# EAGLE board PCB v12 (EAGLE 9.7.0)
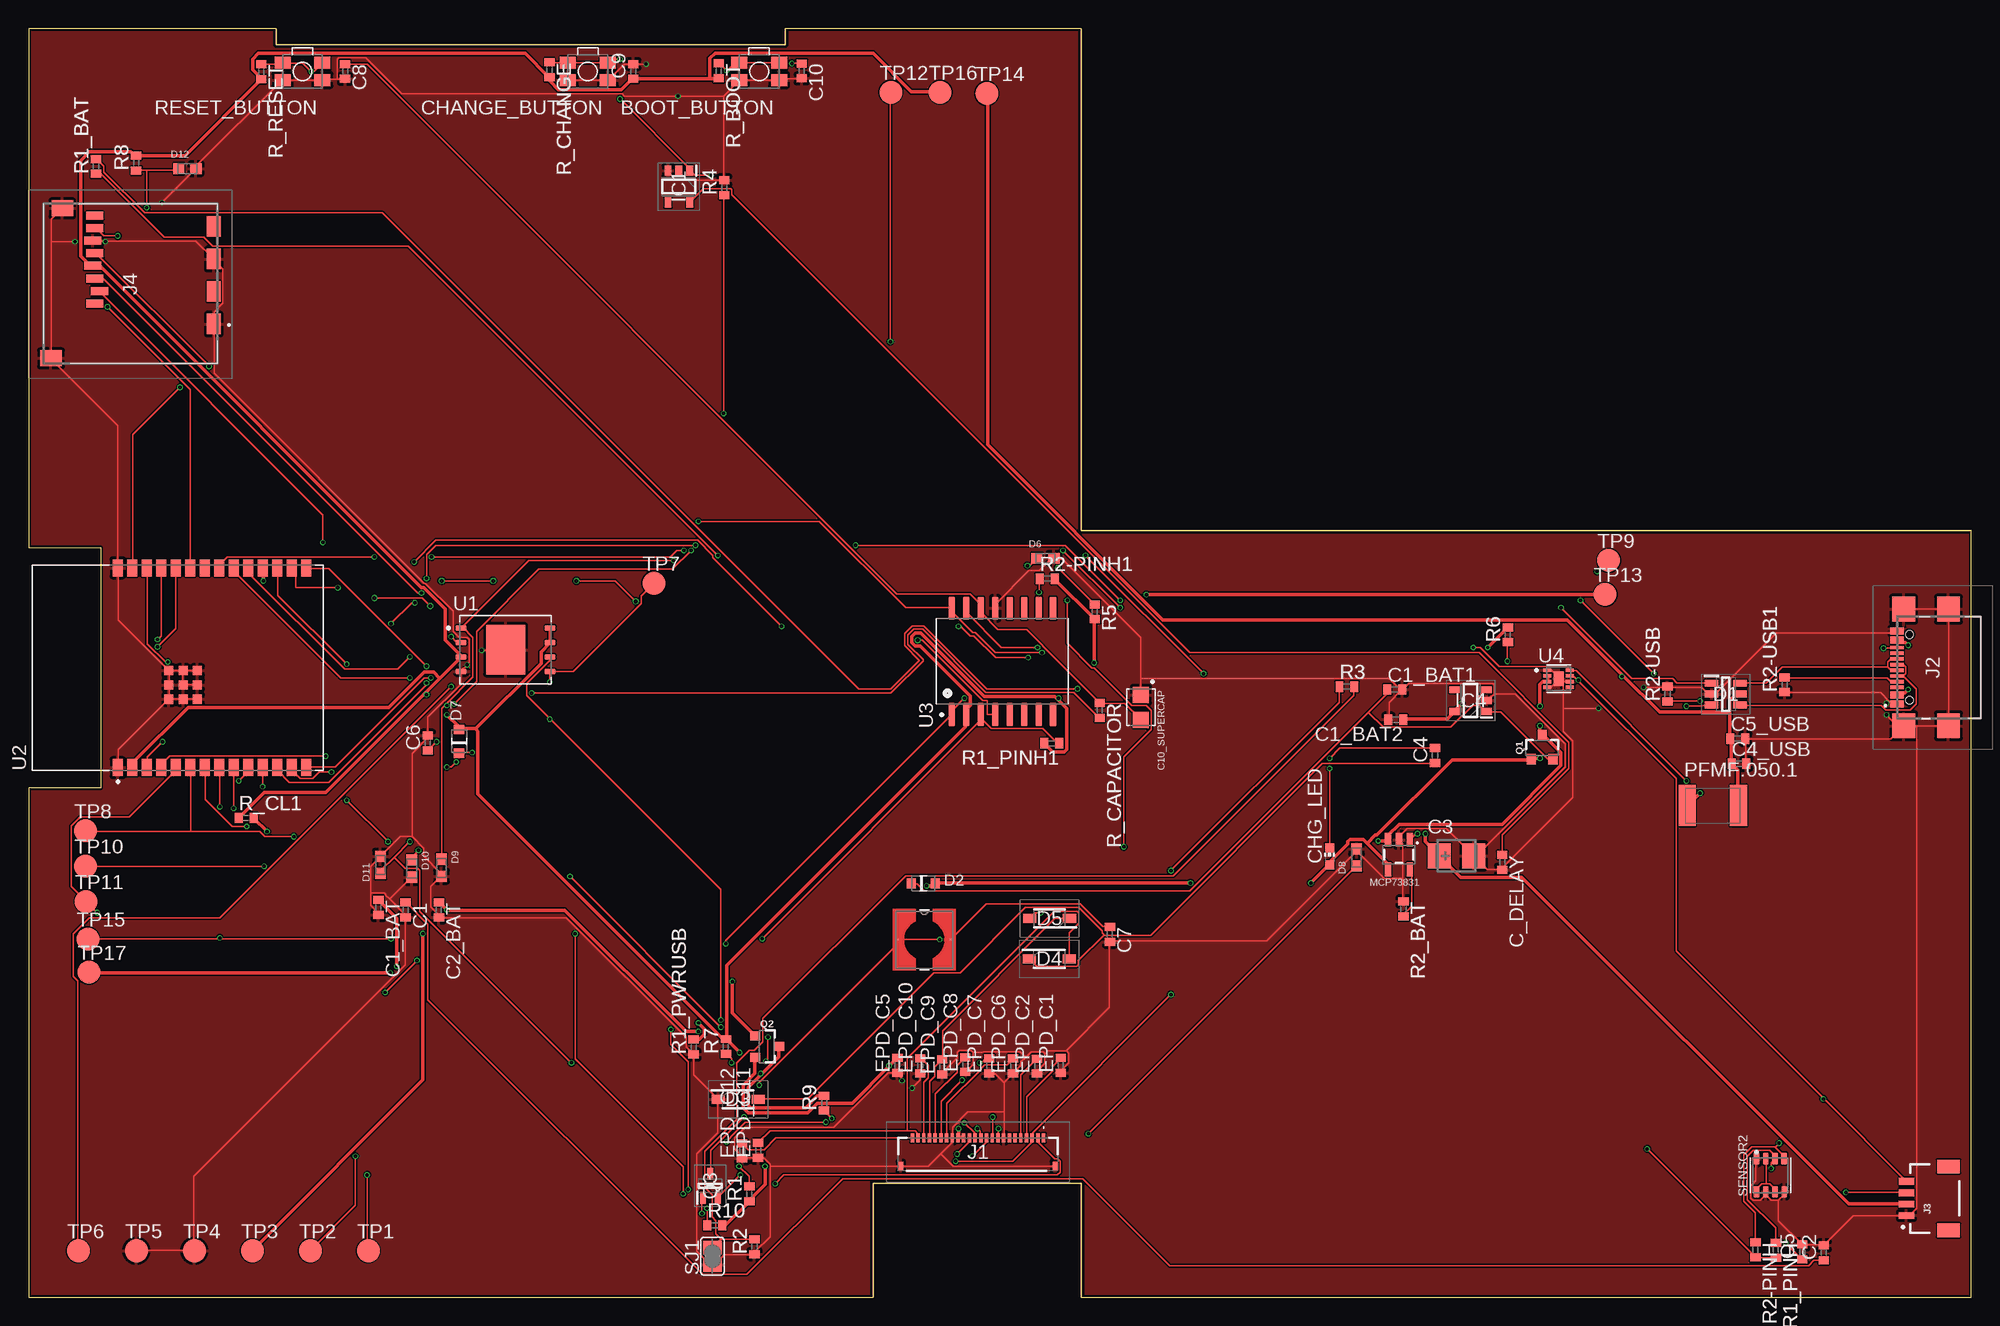
[diagram p0: board, top side]
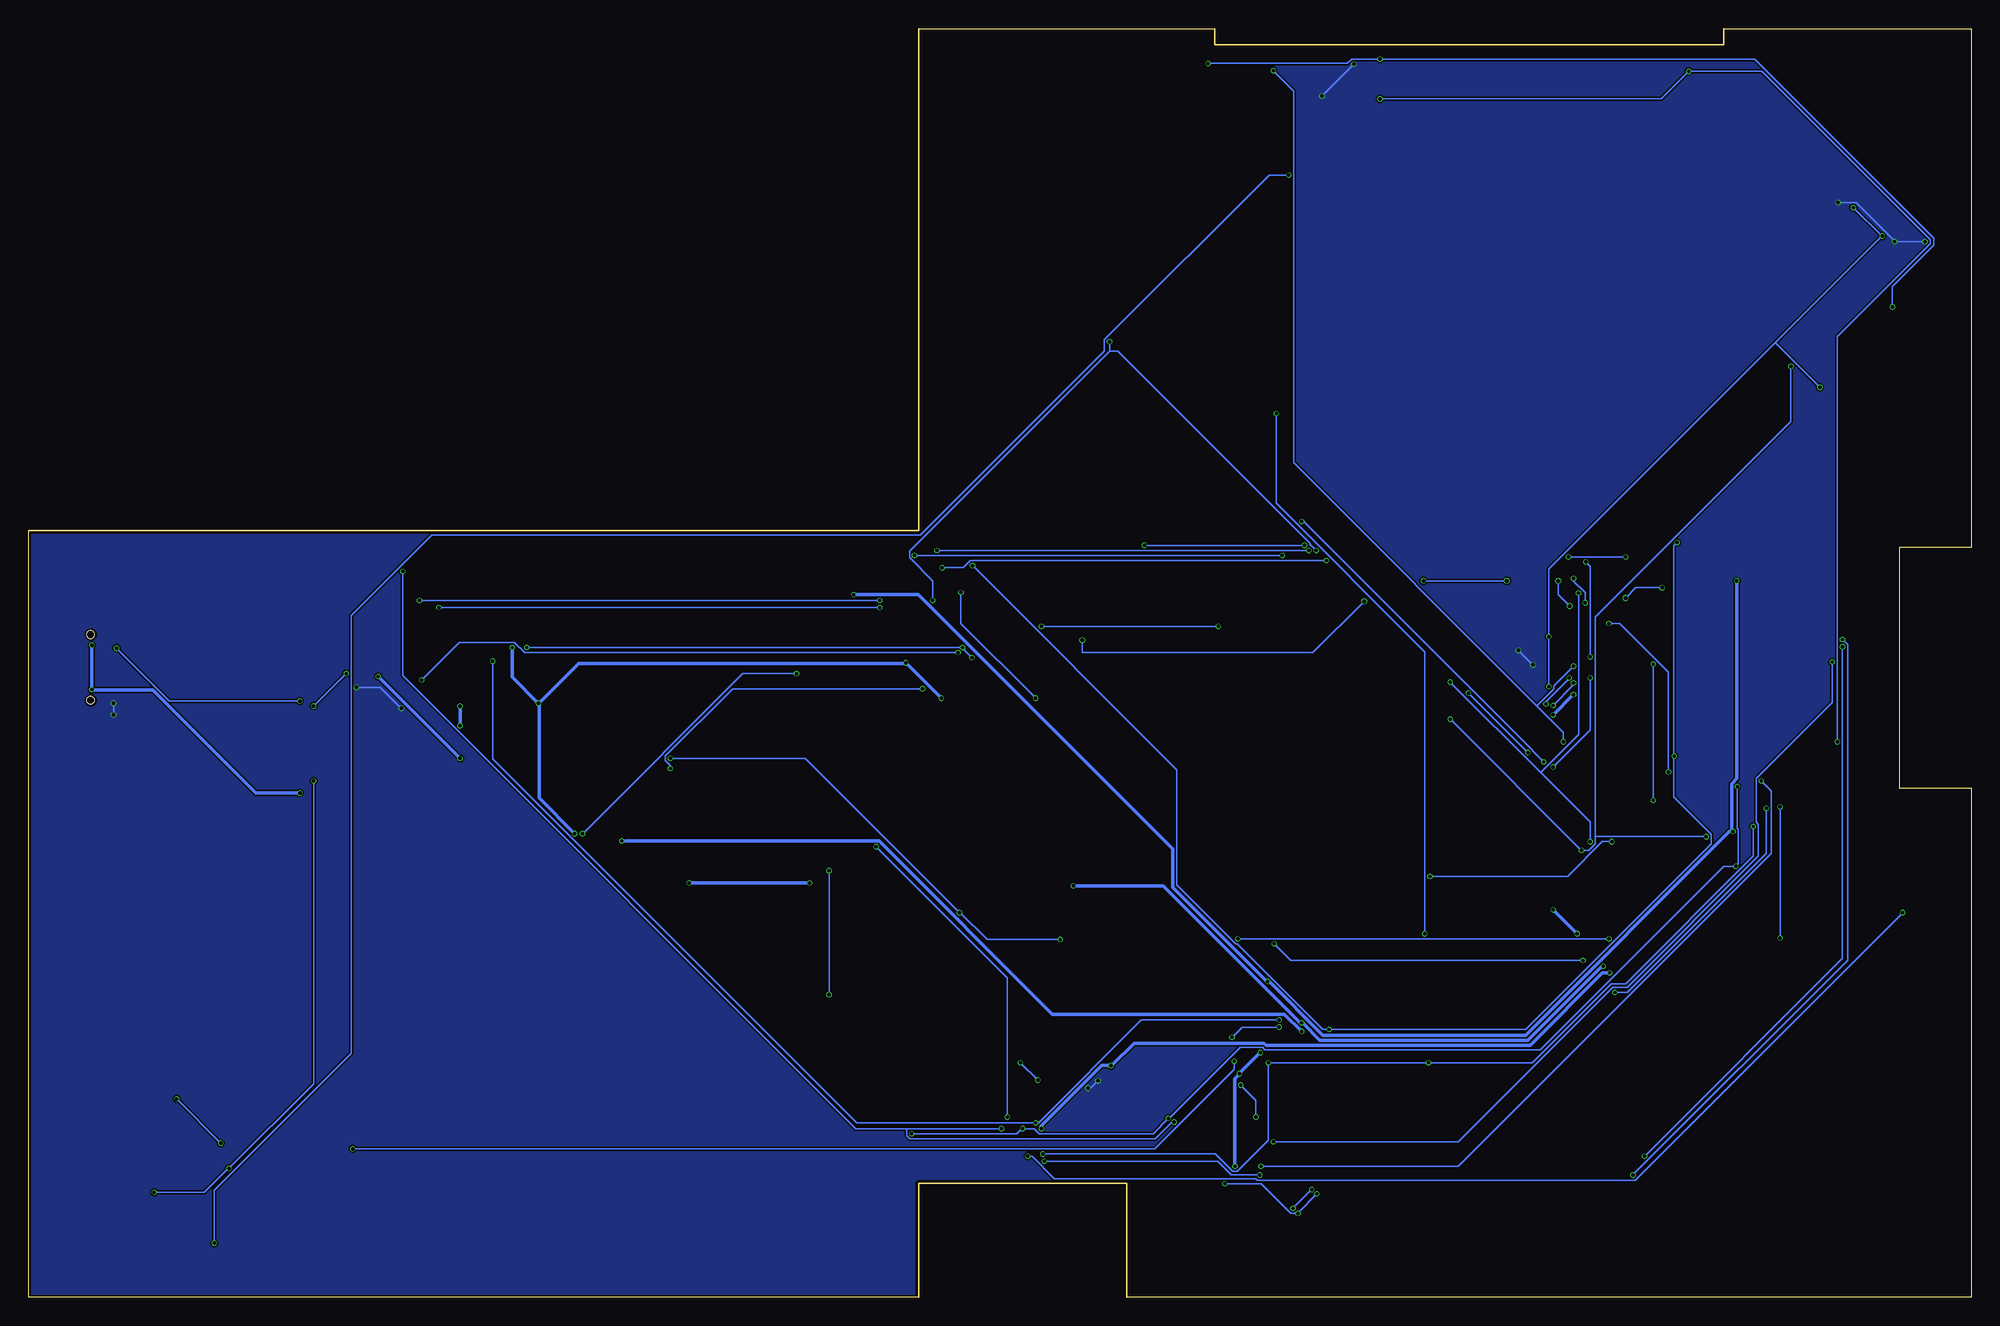
[diagram p1: board, bottom side, seen from below]

Size 170.2 x 111.2 mm. Coordinates in mm from the lower left corner, seen from the top.
Outline: 0,0 74,0 74,10 92.2,10 92.2,0 170.2,0 170.2,67.2 92.2,67.2 92.2,111.2 66.3,111.2 66.3,109.8 21.7,109.8 21.7,111.2 0,111.2 0,65.7 6.33,65.7 6.33,44.67 0,44.67 0,0
Copper layers (1*16): Top 0.035mm / dielectric 1.6mm / Bottom 0.035mm
Design rules "jlcpcb-2layers.dru": minimum track width 5mil, minimum drill 0.3mm, track to track 5mil, track to pad 5mil, pad to pad 5mil, via to via 5mil, smd to smd 5mil, copper to edge 0.2mm, drill to drill 6mil, minimum pad ring 10mil, minimum via ring 3mil, stop-mask expansion 4mil, vias tented up to drill 0mil, thermal gap 10mil
Net classes: 1 power: width 0.3 mm; 2 rest: width 0.15 mm

## Footprints (pad centres in the part's own frame; a part is rotated, then mirrored left to right if it is on the bottom)
MYBUTTON = smd 1.4 x 1.05: 1 1.75,0.75; 2 -1.75,0.75; 3 -1.75,-0.75; 4 1.75,-0.75
ESP32_WROVER_EAGLE-LTSPICE_C0402 = smd 0.7 x 0.9: 1 -0.65,0; 2 0.65,0
RCL_CT3528 = smd 2 x 2.2: + -1.5,0; - 1.5,0
EAGLE-LTSPICE_C0402 = smd 0.7 x 0.9: 1 -0.65,0; 2 0.65,0
CAPCP3225X100N = smd 1.4 x 1.4: 1 -1.1,0; 2 1.1,0
ADAFRUIT_CHIP-LED0603 = smd 0.8 x 0.8: A 0,-0.75; C 0,0.75
SOT95P280X145-6N = smd 1.2 x 0.6: 1 -1.25,0.95; 2 -1.25,0; 3 -1.25,-0.95; 4 1.25,-0.95; 5 1.25,0; 6 1.25,0.95
ESP32_WROVER_AVX---SD0805S020S1R0_AVX_SD0805S020S1R0_0 = smd 0.8 x 0.9: 1 -1.05,0; 2 1.05,0
SOD3716X135N = smd 1.15 x 0.8: 1 -1.75,0; 2 1.75,0
DIOC1608X36N = smd 0.97 x 0.94: 1 -0.75,0; 2 0.75,0
SOT95P280X125-5N = smd 0.9 x 0.6: 1 -1.4,0.95; 2 -1.4,0; 3 -1.4,-0.95; 4 1.4,-0.95; 5 1.4,0.95
SOT95P280X120-5N = smd 0.9 x 0.6: 1 -1.4,0.95; 2 -1.4,0; 3 -1.4,-0.95; 4 1.4,-0.95; 5 1.4,0.95
FH34SRJ24S05SH99 = smd 0.3 x 0.8: 1 5.75,1.45; 2 5.25,1.45; 3 4.75,1.45; 4 4.25,1.45; 5 3.75,1.45; 6 3.25,1.45; 7 2.75,1.45; 8 2.25,1.45; 9 1.75,1.45; 10 1.25,1.45; 11 0.75,1.45; 12 0.25,1.45; 13 -0.25,1.45; 14 -0.75,1.45; 15 -1.25,1.45; 16 -1.75,1.45; 17 -2.25,1.45; 18 -2.75,1.45; 19 -3.25,1.45; 20 -3.75,1.45; 21 -4.25,1.45; 22 -4.75,1.45; 23 -5.25,1.45; 24 -5.75,1.45 | smd 0.4 x 0.8: MP1 6.75,-1.05; MP2 -6.75,-1.05
SAMACSYS_PARTS_USB4110GFA = smd 0.3 x 1.15: A1 -3.35,3.678; A4 -2.55,3.678; A5 -1.25,3.678; A6 -0.25,3.678; A7 0.25,3.678; A8 1.25,3.678; A9 2.55,3.678; A12 3.35,3.678; B1 3.05,3.678; B4 2.25,3.678; B5 1.75,3.678; B6 0.75,3.678; B7 -0.75,3.678; B8 -1.75,3.678; B9 -2.25,3.678; B12 -3.05,3.678 | smd 2.18 x 2: MP1 -5.11,-0.827; MP2 5.11,-0.827; MP3 -5.11,3.103; MP4 5.11,3.103 | hole 0.65: -2.89,2.603; 2.89,2.603
JST04_1MM_RA = smd 0.6 x 1.35: 1 -1.5,0; 2 -0.5,0; 3 0.5,0; 4 1.5,0 | smd 1.2 x 2: NC1 2.8,-3.675; NC2 -2.8,-3.675
112ATAARR03ATTEND = smd 1.8 x 1.2: G1 10.6,10.4; G2 4.9,10.4; S1 7.75,10.4; S2 2.05,10.4 | smd 1.4 x 1.9: G3 13.6,-3.85; G4 0.45,-2.85 | smd 0.7 x 1.5: P1 8.8,0; P2 7.7,0.4; P3 6.6,0; P4 5.5,-0.2; P5 4.4,0; P6 3.3,-0.2; P7 2.2,0; P8 1.1,0
IND_4828-WE-TPC_WRE = smd 0.127 x 0.127: 1 -2.286,0; 2 2.286,0
ESP32_WROVER_SPARKFUN-IC-POWER_SOT23-5 = smd 0.55 x 1.2: 1 -0.95,-1.3; 2 0,-1.3; 3 0.95,-1.3; 4 0.95,1.3; 5 -0.95,1.3
ESP32C6_VARISTOR_CT/CN1812 = smd 1.5 x 3.6: 1 -2.25,0; 2 2.25,0
ESP32_WROVER_SPARKFUN-DISCRETESEMI_SOT23-3 = smd 0.8 x 0.9: 1 -0.95,-1; 2 0.95,-1; 3 0,1.1
SOT65P210X110-3N = smd 1.05 x 0.5: 1 -1.05,0.65; 2 -1.05,-0.65; 3 1.05,0
ESP32_WROVER_EAGLE-LTSPICE_R0402 = smd 0.7 x 0.9: 1 -0.65,0; 2 0.65,0
ESP32_WROVER_BME680_PSON80P300X300X100-8N = smd 1.016 x 0.5: 1 1.458,1.2; 2 1.458,0.4; 3 1.458,-0.4; 4 1.458,-1.2; 5 -1.458,-1.22; 6 -1.458,-0.4; 7 -1.458,0.4; 8 -1.458,1.2
SJ = smd 1.168 x 1.6: 1 -0.762,0; 2 0.762,0
TP20R = smd 2 x 2: TP 0,0
SON127P600X800X80-9N = smd 0.94 x 0.44: 1 -3.895,1.905; 2 -3.895,0.635; 3 -3.895,-0.635; 4 -3.895,-1.905; 5 3.895,-1.905; 6 3.895,-0.635; 7 3.895,0.635; 8 3.895,1.905 | smd 3.4 x 4.3: 9 0,0
XCVR_ESP32-C6-WROOM-1-N8 = smd 1.5 x 0.9: 1 -8.75,5.26; 2 -8.75,3.99; 3 -8.75,2.72; 4 -8.75,1.45; 5 -8.75,0.18; 6 -8.75,-1.09; 7 -8.75,-2.36; 8 -8.75,-3.63; 9 -8.75,-4.9; 10 -8.75,-6.17; 11 -8.75,-7.44; 12 -8.75,-8.71; 13 -8.75,-9.98; 14 -8.75,-11.25; 15 8.75,-11.25; 16 8.75,-9.98; 17 8.75,-8.71; 18 8.75,-7.44; 19 8.75,-6.17; 20 8.75,-4.9; 21 8.75,-3.63; 22 8.75,-2.36; 23 8.75,-1.09; 24 8.75,0.18; 25 8.75,1.45; 26 8.75,2.72; 27 8.75,3.99; 28 8.75,5.26 | smd 0.8 x 0.8: 29_1 -2.755,0.79; 29_2 -1.505,0.79; 29_3 -0.255,0.79; 29_4 -2.755,-0.46; 29_5 -1.505,-0.46; 29_6 -0.255,-0.46; 29_7 -2.755,-1.71; 29_8 -1.505,-1.71; 29_9 -0.255,-1.71
SOIC127P1032X265-16N = smd 2.05 x 0.59: 1 -4.655,4.445; 2 -4.655,3.175; 3 -4.655,1.905; 4 -4.655,0.635; 5 -4.655,-0.635; 6 -4.655,-1.905; 7 -4.655,-3.175; 8 -4.655,-4.445; 9 4.655,-4.445; 10 4.655,-3.175; 11 4.655,-1.905; 12 4.655,-0.635; 13 4.655,0.635; 14 4.655,1.905; 15 4.655,3.175; 16 4.655,4.445
SON50P200X200X80-9N = smd 0.76 x 0.27: 1 -0.985,0.75; 2 -0.985,0.25; 3 -0.985,-0.25; 4 -0.985,-0.75; 5 0.985,-0.75; 6 0.985,-0.25; 7 0.985,0.25; 8 0.985,0.75 | smd 0.9 x 1.3: 9 0,0

## Placement (x,y rotation side)
BOOT_BUTTON  BUTTON_CUSYOMV1  [MYBUTTON]  64,107.43 180 top
C1  100nF  [ESP32_WROVER_EAGLE-LTSPICE_C0402]  33.03,33.96 270 top
C1_BAT  4.7uF  [ESP32_WROVER_EAGLE-LTSPICE_C0402]  30.65,34.17 270 top
C1_BAT1  4.7uF  [ESP32_WROVER_EAGLE-LTSPICE_C0402]  119.68,53.27 0 top
C1_BAT2  4.7uF  [ESP32_WROVER_EAGLE-LTSPICE_C0402]  119.78,50.63 180 top
C2  100nF  [ESP32_WROVER_EAGLE-LTSPICE_C0402]  157.27,3.92 90 top
C2_BAT  4.7uF  [ESP32_WROVER_EAGLE-LTSPICE_C0402]  35.95,33.96 270 top
C3  100uF TANT  [RCL_CT3528]  125.09,38.7 0 top
C4  4.7uF/25V  [ESP32_WROVER_EAGLE-LTSPICE_C0402]  123.21,47.51 90 top
C4_USB  100nF  [ESP32_WROVER_EAGLE-LTSPICE_C0402]  149.83,46.77 0 top
C5  100nF  [EAGLE-LTSPICE_C0402]  155.37,4 90 top
C5_USB  4.7uF  [ESP32_WROVER_EAGLE-LTSPICE_C0402]  149.74,48.97 0 top
C6  100nF  [EAGLE-LTSPICE_C0402]  34.97,48.58 90 top
C7  10uF  [ESP32_WROVER_EAGLE-LTSPICE_C0402]  94.73,31.83 270 top
C8  100nF  [ESP32_WROVER_EAGLE-LTSPICE_C0402]  27.73,107.44 270 top
C9  100nF  [ESP32_WROVER_EAGLE-LTSPICE_C0402]  52.97,107.44 90 top
C10  100nF  [EAGLE-LTSPICE_C0402]  67.73,107.48 270 top
C10_SUPERCAP  CPH3225A  [CAPCP3225X100N]  97.44,51.71 270 top
C_DELAY  100nF  [ESP32_WROVER_EAGLE-LTSPICE_C0402]  129.09,38.13 270 top
CHANGE_BUTTON  BUTTON_CUSYOMV1  [MYBUTTON]  49,107.43 180 top
CHG_LED  CHG  [ADAFRUIT_CHIP-LED0603]  113.97,38.65 0 top
D1  USBLC6-2SC6Y  [SOT95P280X145-6N]  148.68,52.87 0 top
D2  ESP32_WROVER_AVX---SD0805S020S1R0_AVX_SD0805S020S1R0_0_0AVX_SD0805S020S1R0_0_0  [ESP32_WROVER_AVX---SD0805S020S1R0_AVX_SD0805S020S1R0_0]  78.39,36.28 0 top
D3  MBR0530  [SOD3716X135N]  62.16,17.37 0 top
D4  MBR0530  [SOD3716X135N]  89.42,29.68 0 top
D5  MBR0530  [SOD3716X135N]  89.44,33.22 180 top
D6  PGB1010603MR  [DIOC1608X36N]  89.08,64.77 0 top
D7  ESP32_WROVER_AVX---SD0805S020S1R0_AVX_SD0805S020S1R0_0_0AVX_SD0805S020S1R0_0_0  [ESP32_WROVER_AVX---SD0805S020S1R0_AVX_SD0805S020S1R0_0]  37.72,48.74 90 top
D8  PGB1010603MR  [DIOC1608X36N]  116.33,38.56 90 top
D9  PGB1010603MR  [DIOC1608X36N]  36.17,37.66 270 top
D10  PGB1010603MR  [DIOC1608X36N]  33.57,37.58 270 top
D11  PGB1010603MR  [DIOC1608X36N]  30.83,37.9 90 top
D12  PGB1010603MR  [DIOC1608X36N]  13.92,98.92 0 top
EPD_C1  1uF/50V  [EAGLE-LTSPICE_C0402]  90.43,20.35 90 top
EPD_C2  1uF/50V  [EAGLE-LTSPICE_C0402]  88.35,20.28 90 top
EPD_C5  0.1uF/50V  [EAGLE-LTSPICE_C0402]  76.11,20.35 90 top
EPD_C6  1uF/50V  [EAGLE-LTSPICE_C0402]  86.25,20.29 90 top
EPD_C7  1uF/50V  [EAGLE-LTSPICE_C0402]  84.15,20.3 90 top
EPD_C8  1uF/50V  [EAGLE-LTSPICE_C0402]  82.05,20.41 90 top
EPD_C9  1uF/50V  [EAGLE-LTSPICE_C0402]  80.05,20.22 90 top
EPD_C10  1uF/50V  [EAGLE-LTSPICE_C0402]  78.11,20.31 90 top
EPD_C11  1uF/50V  [EAGLE-LTSPICE_C0402]  63.91,12.89 90 top
EPD_C12  1uF/50V  [EAGLE-LTSPICE_C0402]  62.51,12.85 90 top
IC1  BD5229G-TR  [SOT95P280X125-5N]  56.97,97.35 270 top
IC4  XC6220A331MR-G  [SOT95P280X120-5N]  126.32,52.31 180 top
J1  FH34SRJ-24S-0.5SH_99_  [FH34SRJ24S05SH99]  83.17,12.54 0 top
J2  SAMACSYS_PARTS_USB4110-GF-A  [SAMACSYS_PARTS_USB4110GFA]  167.36,55.21 90 top
J3  QWIIC_RIGHT_ANGLE  [JST04_1MM_RA]  164.51,8.68 90 top
J4  112A-TAAR-R03_ATTEND  [112ATAARR03ATTEND]  5.82,95.9 270 top
L1  68uH  [IND_4828-WE-TPC_WRE]  78.47,31.35 0 top
MCP73831  ESP32_WROVER_SPARKFUN-IC-POWER_MCP73831  [ESP32_WROVER_SPARKFUN-IC-POWER_SOT23-5]  120.05,38.81 180 top
PFMF.050.1  ESP32C6_VARISTORCN1812  [ESP32C6_VARISTOR_CT/CN1812]  147.54,43.1 0 top
Q1  20V/4.2A/52mΩ/1.4W  [ESP32_WROVER_SPARKFUN-DISCRETESEMI_SOT23-3]  132.59,48.16 0 top
Q2  20V/4.2A/52mΩ/1.4W  [ESP32_WROVER_SPARKFUN-DISCRETESEMI_SOT23-3]  64.66,21.99 270 top
Q3  SI1308EDL-T1-GE3  [SOT65P210X110-3N]  59.72,9.79 90 top
R1  10K  [ESP32_WROVER_EAGLE-LTSPICE_R0402]  63.14,9.08 90 top
R1_BAT  200  [ESP32_WROVER_EAGLE-LTSPICE_R0402]  5.91,99.11 90 top
R1_PINH  10k  [ESP32_WROVER_EAGLE-LTSPICE_R0402]  153.07,4.14 270 top
R1_PINH1  10K  [ESP32_WROVER_EAGLE-LTSPICE_R0402]  89.64,48.56 180 top
R1_PWRUSB  100K  [ESP32_WROVER_EAGLE-LTSPICE_R0402]  58.26,21.95 90 top
R2  2.2  [ESP32_WROVER_EAGLE-LTSPICE_R0402]  63.59,4.45 90 top
R2-PINH  10k  [ESP32_WROVER_EAGLE-LTSPICE_R0402]  151.27,4.18 270 top
R2-PINH1  10K  [ESP32_WROVER_EAGLE-LTSPICE_R0402]  89.23,62.99 0 top
R2-USB  5k1  [ESP32_WROVER_EAGLE-LTSPICE_R0402]  143.57,52.88 90 top
R2-USB1  5k1  [ESP32_WROVER_EAGLE-LTSPICE_R0402]  153.83,53.7 90 top
R2_BAT  2K  [ESP32_WROVER_EAGLE-LTSPICE_R0402]  120.45,34.04 270 top
R3  0.47  [ESP32_WROVER_EAGLE-LTSPICE_R0402]  115.49,53.53 0 top
R4  10K  [ESP32_WROVER_EAGLE-LTSPICE_R0402]  60.94,97.25 90 top
R5  10K  [ESP32_WROVER_EAGLE-LTSPICE_R0402]  93.4,60.09 270 top
R6  10K  [ESP32_WROVER_EAGLE-LTSPICE_R0402]  129.59,58.07 90 top
R7  10K  [ESP32_WROVER_EAGLE-LTSPICE_R0402]  61.09,21.99 90 top
R8  10K  [ESP32_WROVER_EAGLE-LTSPICE_R0402]  9.42,99.41 90 top
R9  10K  [ESP32_WROVER_EAGLE-LTSPICE_R0402]  69.69,17.03 90 top
R10  10K  [ESP32_WROVER_EAGLE-LTSPICE_R0402]  60.12,6.33 0 top
R_BOOT  10K  [ESP32_WROVER_EAGLE-LTSPICE_R0402]  60.47,107.49 270 top
R_CAPACITOR  15  [ESP32_WROVER_EAGLE-LTSPICE_R0402]  93.84,51.45 270 top
R_CHANGE  10K  [ESP32_WROVER_EAGLE-LTSPICE_R0402]  45.64,107.58 270 top
R_CL1  10K  [ESP32_WROVER_EAGLE-LTSPICE_R0402]  19.06,42.03 0 top
R_RESET  10K  [ESP32_WROVER_EAGLE-LTSPICE_R0402]  20.39,107.41 270 top
RESET_BUTTON  BUTTON_CUSYOMV1  [MYBUTTON]  24,107.43 180 top
SENSOR2  BME688  [ESP32_WROVER_BME680_PSON80P300X300X100-8N]  152.58,10.71 90 top
SJ1  SJ1  [SJ]  59.91,3.61 90 top
TP1  TPTP20R  [TP20R]  29.76,4.09 0 top
TP2  TPTP20R  [TP20R]  24.68,4.09 0 top
TP3  TPTP20R  [TP20R]  19.6,4.09 0 top
TP4  TPTP20R  [TP20R]  14.52,4.09 0 top
TP5  TPTP20R  [TP20R]  9.44,4.09 0 top
TP6  TPTP20R  [TP20R]  4.36,4.09 0 top
TP7  TPTP20R  [TP20R]  54.78,62.59 0 top
TP8  TPTP20R  [TP20R]  5,40.89 0 top
TP9  TPTP20R  [TP20R]  138.42,64.59 0 top
TP10  TPTP20R  [TP20R]  5,37.81 0 top
TP11  TPTP20R  [TP20R]  5.04,34.69 0 top
TP12  TPTP20R  [TP20R]  75.55,105.61 0 top
TP13  TPTP20R  [TP20R]  138.1,61.61 0 top
TP14  TPTP20R  [TP20R]  83.95,105.51 0 top
TP15  TPTP20R  [TP20R]  5.2,31.41 0 top
TP16  TPTP20R  [TP20R]  79.85,105.61 0 top
TP17  TPTP20R  [TP20R]  5.29,28.49 0 top
U1  W25Q512JVEIQ  [SON127P600X800X80-9N]  41.79,56.76 0 top
U2  ESP32-C6-WROOM-1-N8  [XCVR_ESP32-C6-WROOM-1-N8]  13.08,55.18 90 top
U3  DS3231SN#  [SOIC127P1032X265-16N]  85.3,55.75 90 top
U4  MAX17048G+T10  [SON50P200X200X80-9N]  134.04,54.22 0 top

## Library data of the parts
BOOT_BUTTON CHANGE_BUTTON CHG_LED PFMF.050.1 RESET_BUTTON SJ1 TP1-TP17 = DeskAssistant v19 v1
C1 C1_BAT C1_BAT1 C1_BAT2 C2 C2_BAT C4 C4_USB C5 C5_USB C6-C10 C_DELAY EPD_C1 EPD_C2 EPD_C5-EPD_C12 = DeskAssistant v19 v1; SPICEMODEL: NONE; SPICEPREFIX: C
C3 = DeskAssistant v19 v1; SPICEPREFIX: C
C10_SUPERCAP = DeskAssistant v19 v1; AVAILABILITY: Not in stock; CHECK_PRICES: https://www.snapeda.com/parts/CPH3225A/Seiko+Instruments/view-part/?ref=eda; DESCRIPTION: 11 mF (EDLC) Supercapacitor 3.3 V 1210 (3225 Metric) - -; MF: Seiko Instruments; MP: CPH3225A; PACKAGE: 1210 Seiko; PRICE: None; PURCHASE-URL: https://www.snapeda.com/api/url_track_click_mouser/?unipart_id=562593&manufacturer=Seiko Instruments&part_name=CPH3225A&search_term=None; SNAPEDA_LINK: https://www.snapeda.com/parts/CPH3225A/Seiko+Instruments/view-part/?ref=snap
D1 = DeskAssistant v19 v1; AVAILABILITY: In Stock; CHECK_PRICES: https://www.snapeda.com/parts/USBLC6-2SC6Y/STMicroelectronics/view-part/?ref=eda; DESCRIPTION: 17V Clamp 5A (8/20µs) Ipp Tvs Diode Surface Mount SOT-23-6; MF: STMicroelectronics; MP: USBLC6-2SC6Y; PACKAGE: SOT-23-6 STMicroelectronics; PRICE: None; SNAPEDA_LINK: https://www.snapeda.com/parts/USBLC6-2SC6Y/STMicroelectronics/view-part/?ref=snap
D2 D7 = DeskAssistant v19 v1; CENTROID_NOT_SPECIFIED: No; DATASHEET: http://datasheets.avx.com/schottky.pdf; DIGIKEY_DESCRIPTION: DIODE SCHOTTKY 20V 1A 0805; DIGIKEY_PART_NUMBER: 478-7800-1-ND; LEAD_FREE: yes; MF: AVX; MOUSER_PART_NUMBER: 581-SD0805S020S1R0; PACKAGE: 0805 (2012 metric); PREFIX: D; ROHS: yes; TEMPERATURE_RANGE_HIGH: +125°C; TEMPERATURE_RANGE_LOW: -55°C
D3-D5 = DeskAssistant v19 v1; AVAILABILITY: In Stock; CHECK_PRICES: https://www.snapeda.com/parts/MBR0530/Onsemi/view-part/?ref=eda; DESCRIPTION: Diode Schottky 30 V 500mA Surface Mount SOD-123; MF: ON Semiconductor; MP: MBR0530; PACKAGE: SOD-123-2 ON Semiconductor; PRICE: None; PURCHASE-URL: https://www.snapeda.com/api/url_track_click_mouser/?unipart_id=179458&manufacturer=ON Semiconductor&part_name=MBR0530&search_term=None; SNAPEDA_LINK: https://www.snapeda.com/parts/MBR0530/Onsemi/view-part/?ref=snap
D6 D8-D12 = DeskAssistant v19 v1; AVAILABILITY: In Stock; CHECK_PRICES: https://www.snapeda.com/parts/PGB1010603MR/Littelfuse/view-part/?ref=eda; DESCRIPTION: 150V (Typ) Clamp - Ipp Tvs Diode Surface Mount 0603 (1608 Metric); MF: Littelfuse Inc.; MP: PGB1010603MR; PACKAGE: 0603 Littelfuse Inc.; PRICE: None; PURCHASE-URL: https://www.snapeda.com/api/url_track_click_mouser/?unipart_id=5659453&manufacturer=Littelfuse Inc.&part_name=PGB1010603MR&search_term=None; SNAPEDA_LINK: https://www.snapeda.com/parts/PGB1010603MR/Littelfuse/view-part/?ref=snap
IC1 = DeskAssistant v19 v1; DESCRIPTION: Voltage Detector with Adjustable Delay Time: CMOS processes are utilized to develop high precision, low current consumption CMOS reset ICs that allow arbitrary setting of the delay time. The extensive lineup includes both Nch Open Drain and CMOS output types in a wide range of detection voltages (from 2.3V to 6.0V, in 0.1V steps), enabling selection of the ideal solution based on customer requirements. In addition, the entire series is of course both lead-free and RoHS-compliant.; HEIGHT: 1.25mm; MANUFACTURER_NAME: ROHM Semiconductor; MANUFACTURER_PART_NUMBER: BD5229G-TR; MOUSER_PART_NUMBER: 755-BD5229G-TR; MOUSER_PRICE-STOCK: https://www.mouser.co.uk/ProductDetail/ROHM-Semiconductor/BD5229G-TR?qs=4kLU8WoGk0vvnhrrYwdszw%3D%3D
IC4 = DeskAssistant v19 v1; DESCRIPTION: LDO Voltage Regulators; HEIGHT: 1.2mm; MANUFACTURER_NAME: Torex; MANUFACTURER_PART_NUMBER: XC6220A331MR-G; MOUSER_PART_NUMBER: 865-XC6220A331MR-G; MOUSER_PRICE-STOCK: https://www.mouser.co.uk/ProductDetail/Torex-Semiconductor/XC6220A331MR-G?qs=AsjdqWjXhJ8ZSWznL1J0gg%3D%3D
J1 = DeskAssistant v19 v1; DESCRIPTION: 24 Position FFC, FPC Connector Contacts, Top and Bottom 0.020" (0.50mm) Surface Mount, Right Angle; HEIGHT: 1.1mm; MANUFACTURER_NAME: Hirose; MANUFACTURER_PART_NUMBER: FH34SRJ-24S-0.5SH(99); MOUSER_PART_NUMBER: 798-FH34SRJ24S05SH99; MOUSER_PRICE-STOCK: https://www.mouser.co.uk/ProductDetail/Hirose-Connector/FH34SRJ-24S-0.5SH99?qs=vcbW%252B4%252BSTIpKBl5ap9J8Fw%3D%3D
J2 = DeskAssistant v19 v1; DESCRIPTION: CONN USB 2.0 TYPE-C R/A SMT; HEIGHT: 3.26mm; MANUFACTURER_NAME: GCT (GLOBAL CONNECTOR TECHNOLOGY); MANUFACTURER_PART_NUMBER: USB4110-GF-A; MOUSER_PART_NUMBER: 640-USB4110-GF-A; MOUSER_PRICE-STOCK: https://www.mouser.co.uk/ProductDetail/GCT/USB4110-GF-A?qs=KUoIvG%2F9IlYiZvIXQjyJeA%3D%3D
J3 = DeskAssistant v19 v1; PROD_ID: CONN-13694
J4 = DeskAssistant v19 v1; DESCRIPTION: Micro SD Card Socket, Push-Push Type, Top Mount, SMT, H=1.83mm, 10u; HEIGHT: 1.9mm; MANUFACTURER_NAME: ATTEND; MANUFACTURER_PART_NUMBER: 112A-TAAR-R03 ATTEND
L1 = DeskAssistant v19 v1; COPYRIGHT: Copyright (C) 2024 Ultra Librarian. All rights reserved.; MANUFACTURER_PART_NUMBER: 744043680; MFR_NAME: Wurth Electronics
MCP73831 = DeskAssistant v19 v1; PROD_ID: IC-09995
Q1 Q2 = DeskAssistant v19 v1; PROD_ID: TRAN-14388
Q3 = DeskAssistant v19 v1; AVAILABILITY: In Stock; CHECK_PRICES: https://www.snapeda.com/parts/SI1308EDL-T1-GE3/Vishay+Siliconix/view-part/?ref=eda; DESCRIPTION: Si1308EDL-T1-GE3 N-channel MOSFET Transistor, 1.5 A, 30 V, 3-Pin SC-70 | Siliconix / Vishay SI1308EDL-T1-GE3; MF: Vishay Siliconix; MP: SI1308EDL-T1-GE3; PACKAGE: SOT-323 Vishay Semiconductor; PRICE: None; PURCHASE-URL: https://www.snapeda.com/api/url_track_click_mouser/?unipart_id=274603&manufacturer=Vishay Siliconix&part_name=SI1308EDL-T1-GE3&search_term=None; SNAPEDA_LINK: https://www.snapeda.com/parts/SI1308EDL-T1-GE3/Vishay+Siliconix/view-part/?ref=snap
R1 R1_BAT R1_PINH R1_PINH1 R1_PWRUSB R2 R2-PINH R2-PINH1 R2-USB R2-USB1 R2_BAT R3-R10 R_BOOT R_CAPACITOR R_CHANGE R_CL1 R_RESET = DeskAssistant v19 v1; SPICEMODEL: NONE; SPICEPREFIX: R
SENSOR2 = DeskAssistant v19 v1; AVAILABILITY: Unavailable; DESCRIPTION: Integrated Environmental Unit; MF: Bosch Sensortec; MP: BME680; PACKAGE: LGA-8 Bosch Tools; PRICE: None
U1 = DeskAssistant v19 v1; AVAILABILITY: In Stock; CHECK_PRICES: https://www.snapeda.com/parts/W25Q512JVEIQ/Winbond+Electronics/view-part/?ref=eda; DESCRIPTION: FLASH - NOR Memory IC 512Mb (64M x 8) SPI - Quad I/O 133 MHz 8-WSON (8x6); MF: Winbond Electronics; MP: W25Q512JVEIQ; PACKAGE: Package; PRICE: None; SNAPEDA_LINK: https://www.snapeda.com/parts/W25Q512JVEIQ/Winbond+Electronics/view-part/?ref=snap
U2 = DeskAssistant v19 v1; AVAILABILITY: In Stock; CHECK_PRICES: https://www.snapeda.com/parts/ESP32-C6-WROOM-1-N8/Espressif+Systems/view-part/?ref=eda; DESCRIPTION: Multiprotocol Modules ESP32-C6 module, Wi-Fi 6 in 2.4 GHz band, Bluetooth 5, Zigbee 3.0 and Thread. ESP34-WROOM Compatible - ENGINEERING SAMPLE; MF: Espressif Systems; MP: ESP32-C6-WROOM-1-N8; PACKAGE: None; PRICE: None; SNAPEDA_LINK: https://www.snapeda.com/parts/ESP32-C6-WROOM-1-N8/Espressif+Systems/view-part/?ref=snap
U3 = DeskAssistant v19 v1; AVAILABILITY: In Stock; CHECK_PRICES: https://www.snapeda.com/parts/DS3231SN%23/Analog+Devices/view-part/?ref=eda; DESCRIPTION: Extremely Accurate I²C-Integrated RTC/TCXO/Crystal; MF: Analog Devices; MP: DS3231SN#; PACKAGE: SOIC-16 Maxim; PRICE: None; PURCHASE-URL: https://www.snapeda.com/api/url_track_click_mouser/?unipart_id=99048&manufacturer=Analog Devices&part_name=DS3231SN#&search_term=None; SNAPEDA_LINK: https://www.snapeda.com/parts/DS3231SN%23/Analog+Devices/view-part/?ref=snap
U4 = DeskAssistant v19 v1; AVAILABILITY: In Stock; CHECK_PRICES: https://www.snapeda.com/parts/MAX17048G+T10/Analog+Devices/view-part/?ref=eda; DESCRIPTION: 3µA 1-Cell/2-Cell Fuel Gauge with ModelGauge; MF: Analog Devices; MP: MAX17048G+T10; PACKAGE: TDFN-8 Maxim; PRICE: None; PURCHASE-URL: https://www.snapeda.com/api/url_track_click_mouser/?unipart_id=329239&manufacturer=Analog Devices&part_name=MAX17048G+T10&search_term=None; SNAPEDA_LINK: https://www.snapeda.com/parts/MAX17048G+T10/Analog+Devices/view-part/?ref=snap

## Nets
3V3 [power]: C1_BAT2.1 C3.+ C9.1 D7.2 IC4.5 J3.2 J4.P4 Q2.3 R1.1 R1_PINH1.2 R2-PINH1.2 R5.2 R6.2 R7.2 R8.2 R9.2 R10.2 R_BOOT.2 R_CHANGE.2 R_CL1.1 R_RESET.2 TP16.TP U1.3 U1.7 U1.8 U2.2 U3.2
32KHZ [rest]: R2-PINH1.1 U2.9 U3.1
DN [rest]: D1.4 J2.A7 J2.B7
DP [rest]: D1.6 J2.A6 J2.B6
EDP_3V3 [rest]: C7.1 L1.2
EPD_3V3 [power]: EPD_C5.2 J1.15 J1.16 Q2.2 TP17.TP
EPD_3V3_C [power]: Q2.1 R_CL1.2 TP13.TP U2.18
EPD_BUSY [rest]: J1.9 TP9.TP U2.26
EPD_CS [rest]: D8.1 J1.12 R9.1 TP10.TP U2.11
EPD_DC [rest]: J1.11 TP11.TP U2.5
EPD_RST [rest]: J1.10 TP12.TP U2.21
FLASH_CS [rest]: D9.1 R5.1 U1.1 U2.12
GDR [rest]: J1.2 Q3.1 R4.1
GND [rest]: BOOT_BUTTON.1 BOOT_BUTTON.2 C1.2 C1_BAT1.2 C1_BAT2.2 C1_BAT.2 C2.2 C2_BAT.2 C3.- C4_USB.2 C5.2 C5_USB.2 C6.2 C7.2 C8.2 C9.2 C10.2 C10_SUPERCAP.1 C_DELAY.2 CHANGE_BUTTON.1 CHANGE_BUTTON.2 D1.2 D3.1 D6.2 D8.2 D9.2 D10.2 D11.2 D12.2 EPD_C1.1 EPD_C2.1 EPD_C5.1 EPD_C6.1 EPD_C7.1 EPD_C8.1 EPD_C9.1 EPD_C10.1 EPD_C11.1 EPD_C12.1 IC1.3 IC4.2 J1.8 J1.17 J1.MP1 J1.MP2 J2.A1 J2.A12 J2.B1 J2.B12 J2.MP1 J2.MP2 J2.MP3 J2.MP4 J3.1 J4.G1 J4.G2 J4.G3 J4.G4 J4.P6 MCP73831.2 R1_PWRUSB.1 R2-USB1.1 R2-USB.2 R2.1 R2_BAT.1 R4.2 RESET_BUTTON.1 RESET_BUTTON.2 SENSOR2.1 SENSOR2.5 SENSOR2.7 SJ1.1 TP4.TP TP5.TP U1.4 U1.9 U2.1 U2.28 U2.29_1 U2.29_2 U2.29_3 U2.29_4 U2.29_5 U2.29_6 U2.29_7 U2.29_8 U2.29_9 U3.13 U4.1 U4.4 U4.6 U4.9
GPIO8 [rest]: R1.2 U2.10
I2C_PW [rest]: R1_PINH.2 R2-PINH.2 U2.17
IC2_PW [rest]: C1.1 C2.1
INT_RTC [rest]: R1_PINH1.1 TP15.TP U2.8 U3.3
IO/BOOT [rest]: BOOT_BUTTON.3 BOOT_BUTTON.4 C6.1 R_BOOT.1 U2.15
IO/CHANGE [rest]: C10.1 CHANGE_BUTTON.3 CHANGE_BUTTON.4 R_CHANGE.1 U2.23
MISO [rest]: D12.1 J4.P7 R8.1 TP6.TP U1.2 U2.27
MOSI [rest]: D11.1 J1.14 J4.P3 R7.1 TP7.TP U1.5 U2.7
N$1 [rest]: EPD_C10.2 J1.22
N$2 [rest]: C1_BAT1.1 D2.1 IC4.1 IC4.3 Q1.2
N$3 [rest]: MCP73831.5 R2_BAT.2
N$4 [rest]: EPD_C8.2 J1.20
N$5 [rest]: J2.B5 R2-USB.1
N$6 [rest]: C4.1 D3.2 D4.1
N$7 [rest]: MCP73831.1 R1_BAT.1
N$8 [rest]: CHG_LED.C R1_BAT.2
N$9 [rest]: EPD_C7.2 J1.19
N$10 [rest]: J2.A5 R2-USB1.2
N$11 [rest]: EPD_C6.2 J1.18
N$12 [rest]: EPD_C12.2 J1.24
N$13 [rest]: D7.1 R_CAPACITOR.2
N$14 [rest]: EPD_C2.2 J1.5
N$15 [rest]: EPD_C1.2 J1.4
N$17 [rest]: SENSOR2.2 SENSOR2.6 SENSOR2.8
N$21 [rest]: C_DELAY.1 IC1.5
PREVGH [rest]: D5.1 EPD_C9.2 J1.21
PREVGL [rest]: D4.2 EPD_C11.2 J1.23
RESE [rest]: J1.3 Q3.2 R3.1
RESE' [rest]: R2.2 R3.2 SJ1.2
RESET [rest]: C5.1 IC1.1 R_RESET.1 RESET_BUTTON.3 RESET_BUTTON.4 U2.3
RTC_RST [rest]: U2.16 U3.4
RX [rest]: TP2.TP U2.24
SCK [rest]: D10.1 J1.13 J4.P5 R6.1 TP8.TP U1.6 U2.6
SCL [rest]: J3.4 R2-PINH.1 SENSOR2.4 U2.20 U3.16 U4.7
SDA [rest]: J3.3 R1_PINH.1 SENSOR2.3 U2.19 U3.15 U4.8
SRC [rest]: C4.2 D5.2 L1.1 Q3.3
SS_SD [rest]: D6.1 J4.P2 R10.1 U2.4
TX [rest]: TP1.TP U2.25
USB_D+ [rest]: D1.1 U2.14
USB_D- [rest]: D1.3 U2.13
VBAT [power]: C2_BAT.1 MCP73831.3 Q1.3 TP3.TP U4.2 U4.3
VBUS [power]: C1_BAT.1 C4_USB.1 C5_USB.1 CHG_LED.A D1.5 D2.2 MCP73831.4 PFMF.050.1.2 Q1.1 R1_PWRUSB.2 TP14.TP
VRTC [rest]: C8.1 C10_SUPERCAP.2 R_CAPACITOR.1 U3.14
VUSB [power]: J2.A4 J2.A9 J2.B4 J2.B9 PFMF.050.1.1

## Tracks (layer width: path | path; a pad name or v marks a point on that pad's centre or on a via)
3V3  (via drill 0.3)
  Top 0.3: R2-PINH1.2 89.92,62.93 93.34,59.5 R5.2 93.34,59.31 v93.34,55.63 | 90.14,52.42 90.93,51.63 90.93,48.01 90.74,47.82 89.72,47.82 89.03,48.51 R1_PINH1.2 | v90.23,52.51 90.14,52.42 | C1_BAT2.1 120.46,50.67 124.27,50.67 124.9,51.31 IC4.5 124.97,51.5 v125.54,52.07 | v127.83,56.96 129.54,58.67 R6.2 | J3.2 164.47,8.19 159.45,8.19 130.81,36.83 125.48,36.83 123.64,38.67 C3.+ 123.51,38.8 122.36,39.94 v122.36,40.64 | 59.69,106.81 60.45,106.81 R_BOOT.2 | 59.69,106.81 53.02,106.81 C9.1 52.83,106.74 51.94,105.86 46.42,105.86 45.66,106.62 45.66,106.87 R_CHANGE.2 45.53,107 43.5,109.03 20.13,109.03 19.62,108.52 19.62,107.57 20.32,106.87 R_RESET.2 20.38,106.74 13.72,100.08 9.46,100.08 R8.2 9.27,100.08 8.95,100.39 5.33,100.39 4.57,99.63 4.57,91.25 5.4,90.42 5.59,90.42 J4.P4 5.71,90.3 6.35,90.3 34.41,62.23 34.62,62.23 36.51,60.35 36.51,57.59 37.85,56.26 U1.3 37.85,56.07 36.04,54.26 | 59.69,106.81 59.69,108.58 60.13,109.03 73.98,109.03 77.34,105.66 79.82,105.66 TP16.TP | R10.2 60.77,6.35 61.09,6.35 63.12,8.38 R1.1 63.18,8.57 64.52,9.91 v64.52,11.49 | 64.2,19.56 63.06,18.41 63.06,16.83 63.25,16.64 68.07,16.64 69.09,17.65 69.66,17.65 R9.2 | 64.2,19.56 65.72,21.08 65.72,21.97 Q2.3 | v62.29,21.46 61.15,22.61 R7.2 | v64.14,19.62 64.2,19.56 | 39.18,49.85 37.78,49.85 D7.2 37.72,49.97 v36.64,51.05 | 39.18,49.85 44.9,55.56 44.9,56.58 45.66,57.34 U1.7 45.72,57.53 45.72,58.61 U1.8 | 34.7,52.93 36.04,54.26 | 34.7,52.93 26.04,44.26 20.64,44.26 R_CL1.1 | v34.86,52.83 34.8,52.83 34.7,52.93 | R7.2 60.96,22.67 60.83,22.67 39.37,44.13 39.37,49.59 39.24,49.72 39.18,49.85 | R7.2 61.15,22.73 61.15,29.08 82.04,49.97 82.04,50.99 U3.2 82.17,51.12 82.17,51.56 82.48,51.88 82.48,52.72 78.13,57.07 77.68,57.07 77.37,57.38 77.37,57.92 77.68,58.23 78.17,58.23 83.72,52.68 89.88,52.68 90.14,52.42
  Top 0.3: 36.04,54.26 35.5,54.8 34.67,54.8 31.56,51.69 13.97,51.69 9.14,46.86 9.14,46.48 U2.2
  Bottom 0.3: v90.23,52.51 v93.34,55.63 93.47,55.56 121.98,55.56 125.41,52.13 v125.54,52.07 | v127.83,56.96 127.83,54.36 v125.54,52.07 | v122.36,40.64 125.48,43.75 125.48,51.94 v125.54,52.07 | v62.29,21.46 v64.14,19.62 64.2,19.49 64.52,19.18 v64.52,11.49 | v34.86,52.83 v36.64,51.05
32KHZ  (via drill 0.3)
  Top 0.15: v88.52,61.78 88.52,62.93 R2-PINH1.1 | v81.98,52.51 80.9,51.44 80.9,51.12 U3.1 80.83,51.05 61.09,31.3 v61.09,30.99 | v17.97,42.86 17.97,46.42 U2.9 | v34.04,29.53 v31.24,26.73
  Bottom 0.15: v88.52,61.78 88.52,59.05 v81.98,52.51 | v17.97,42.86 17.97,38.92 30.16,26.73 v31.24,26.73 | v34.04,29.53 59.63,29.53 v61.09,30.99
DN
  Top 0.15: 164.27,54.48 163.7,54.48 J2.B7 | 164.27,54.48 164.47,54.67 164.47,55.24 164.27,55.44 163.7,55.44 J2.A7 | D1.4 149.99,51.88 162.31,51.88 162.69,51.5 164.85,51.5 165.35,52.01 165.35,53.34 164.27,54.42 164.27,54.48
DP
  Top 0.15: 162.88,55.24 163.13,54.99 163.64,54.99 J2.A6 | 162.88,55.24 162.88,55.69 163.13,55.94 163.64,55.94 J2.B6 | 162.88,55.24 153.61,55.24 152.21,53.85 149.99,53.85 D1.6
EDP_3V3
  Top 0.15: C7.1 94.68,32.51 94.11,32.51 92.14,34.48 83.88,34.48 80.77,31.37 L1.2
EPD_3V3  (via drill 0.3)
  Top 0.3: J1.15 81.92,14.03 81.47,14.03 J1.16 81.47,14.16 v81.47,14.8 | 75.41,20.29 76.07,20.95 EPD_C5.2 | 75.41,20.29 72.14,17.02 69.09,17.02 68.26,16.19 63.06,16.19 62.61,16.64 62.61,18.61 63.63,19.62 63.63,21.02 Q2.2 | v75.37,20.32 75.41,20.29 | v31.69,28.45 5.33,28.45 TP17.TP
  Bottom 0.3: v81.47,14.8 81.47,15.05 76.2,20.32 v75.37,20.32 75.25,20.38 73.34,22.29 61.98,22.29 61.78,22.1 38.67,22.1 32.32,28.45 v31.69,28.45
EPD_3V3_C  (via drill 0.3)
  Top 0.3: v20.89,40.83 19.75,41.97 R_CL1.2 | v61.66,27.69 61.66,24.96 63.63,22.99 Q2.1 | v97.92,61.59 138.05,61.59 TP13.TP | v20.57,62.8 20.57,63.88 U2.18
  Bottom 0.3: v97.92,61.59 92.27,61.59 69.98,39.31 69.98,35.94 61.78,27.75 v61.66,27.69 61.53,27.69 56.83,22.99 39.05,22.99 21.21,40.83 v20.89,40.83 21.02,40.96 21.02,45.02 20.57,45.47 v20.57,62.8
EPD_BUSY  (via drill 0.3)
  Top 0.15: v84.96,14.8 84.96,14.03 J1.9 | v137.41,63.63 138.37,64.58 TP9.TP | v12.19,55.69 12,55.69 10.41,57.28 10.41,63.88 U2.26 | v61.15,13.65 61.53,14.03 61.53,14.1 62.8,15.37 v69.85,15.37
  Bottom 0.15: 93.28,14.8 97.73,14.8 137.41,54.48 v137.41,63.63 | 93.28,14.8 v84.96,14.8 | v12.19,55.69 12.19,52.13 18.86,45.47 18.86,41.66 18.67,41.47 18.67,38.67 30.16,27.18 31.43,27.18 44.96,13.65 v61.15,13.65 | v69.85,15.37 70.04,15.37 71.5,13.91 93.03,13.91 93.28,14.16 93.28,14.8
EPD_CS  (via drill 0.3)
  Top 0.15: v83.12,14.8 83.38,14.54 83.38,14.03 J1.12 | v70.36,15.68 69.72,16.32 R9.1 | v92.84,14.35 116.27,37.78 D8.1 | v20.64,37.78 5.02,37.78 TP10.TP | v20.51,44.77 20.51,46.42 U2.11
  Bottom 0.15: v92.84,14.35 83.63,14.35 83.19,14.8 v83.12,14.8 82.11,14.8 81.66,14.35 71.69,14.35 v70.36,15.68 70.29,15.68 64.07,21.91 62.1,21.91 61.91,21.72 37.78,21.72 21.72,37.78 v20.64,37.78 20.64,37.85 20.45,38.04 20.45,41.02 20.51,41.08 v20.51,44.77
EPD_DC  (via drill 0.3)
  Top 0.15: v82.68,12.38 83.88,13.59 83.88,13.97 J1.11 | v6.03,33.72 5.08,34.67 TP11.TP 5.02,34.73 3.75,36.01 3.75,41.34 4.51,42.1 8.83,42.1 12.89,46.16 12.89,46.42 U2.5
  Bottom 0.15: v82.68,12.38 82.3,12.38 80.33,10.41 62.67,10.41 62.55,10.29 29.46,10.29 v6.03,33.72
EPD_RST  (via drill 0.3)
  Top 0.15: v84.45,15.81 84.45,14.03 J1.10 | v95.95,39.5 95.95,47.37 98.36,49.78 98.36,51.44 97.92,51.88 96.65,51.88 93.34,55.18 93.15,55.18 91,57.34 v91,61.09 | v75.5,83.76 75.5,105.6 TP12.TP | v30.29,64.9 17.4,64.9 16.76,64.26 16.76,63.94 U2.21 | v35.31,64.9 56.2,64.9 56.77,65.47 v57.4,65.47
  Bottom 0.15: v84.45,15.81 84.45,28 v95.95,39.5 | v91,61.09 91,62.8 93.03,64.83 93.03,65.41 75.5,82.93 | v75.5,83.76 75.5,82.93 | v35.31,64.9 v30.29,64.9 | v57.4,65.47 57.98,66.04 57.98,66.1 74.8,82.93 75.5,82.93
FLASH_CS  (via drill 0.3)
  Top 0.15: v90.17,63.94 93.34,60.77 R5.1 | v56.52,64.58 43.81,64.58 37.91,58.67 U1.1 38.04,58.74 38.92,57.85 38.92,54.36 36.54,51.98 | 36.54,51.98 36.2,51.63 36.2,38.42 D9.1 | v34.86,53.85 34.86,53.72 26.29,45.15 22.86,45.15 21.84,46.16 21.84,46.42 U2.12 | 36.54,51.98 v36.64,51.88
  Bottom 0.15: v90.17,63.94 88.33,63.94 87.69,64.58 v56.52,64.58 | v34.86,53.85 34.86,53.66 v36.64,51.88
GDR  (via drill 0.3)
  Top 0.15: v65.41,9.97 66.17,10.73 90.11,10.73 90.36,10.99 90.36,11.94 90.17,12.13 89.92,12.13 88.46,13.59 88.46,13.97 J1.2 | v58.99,7.37 58.99,8.64 59.05,8.7 Q3.1 | v60.9,77.47 60.9,96.58 R4.1 | v47.88,31.88 47.88,20.89 57.34,11.43 v57.34,9.08
  Bottom 0.15: v65.41,9.97 62.23,9.97 59.63,7.37 v58.99,7.37 58.99,7.43 v57.34,9.08 | v60.9,77.47 60.9,69.6 47.88,56.58 v47.88,31.88
GND  (via drill 0.3)
  Top 0.15: U2.29_1 12.32,52.45 12.32,53.66 U2.29_2 12.32,53.72 12.32,54.86 U2.29_3 | U2.29_1 12.38,52.45 13.53,52.45 U2.29_4 13.59,52.45 14.73,52.45 U2.29_7 | U2.1 7.87,46.48 7.87,48.01 12.26,52.39 U2.29_1 | U2.29_3 12.32,54.93 13.53,54.93 U2.29_6 | U2.29_6 13.53,54.86 13.53,53.72 U2.29_5 13.59,53.72 14.73,53.72 U2.29_8 | U2.29_9 14.73,54.93 13.59,54.93 U2.29_6 | U2.29_3 12.26,54.99 7.87,59.37 7.87,63.88 U2.28 7.81,64.01 7.81,76.39 1.97,82.23 J4.G3 1.97,82.36 1.97,92.52 | CHANGE_BUTTON.1 47.31,106.68 50.74,106.68 CHANGE_BUTTON.2 50.8,106.68 52.2,108.08 52.96,108.08 C9.2 53.02,108.08 v54.1,108.08 | IC1.3 56.07,98.74 56.07,98.55 56.71,97.92 60.9,97.92 R4.2 60.9,97.98 60.9,105.28 | C10.2 67.69,106.81 65.85,106.81 65.79,106.74 BOOT_BUTTON.2 65.72,106.68 62.29,106.68 BOOT_BUTTON.1 62.23,106.62 60.9,105.28 | 60.9,105.28 v56.9,105.28 52.2,105.28 52.01,105.47 32.7,105.47 29.53,108.65 27.18,108.65 27.05,108.52 27.05,106.74 | 27.05,106.74 25.78,106.74 RESET_BUTTON.2 25.72,106.68 22.29,106.68 RESET_BUTTON.1 22.23,106.68 14.67,99.12 14.67,98.93 D12.2 14.61,98.87 v11.68,95.95 | 27.05,106.74 27.69,106.74 C8.2 | 1.97,92.52 1.97,94.49 2.92,95.44 J4.G4 | 6.73,92.58 14.67,92.58 16.19,91.06 J4.G2 16.19,90.93 17.02,90.11 17.02,87.12 16.26,86.36 16.26,85.34 J4.G1 16.26,85.28 16.26,81.01 34.68,62.59 34.77,62.59 37.21,60.15 37.21,58.36 37.72,57.85 38.42,57.85 38.61,57.66 38.61,55.69 38.42,55.5 v38.42,55.44 37.91,54.93 U1.4 37.85,54.8 37.85,53.72 34.99,50.86 34.99,49.28 C6.2 34.92,49.21 34.92,49.02 33.59,47.69 33.59,40.39 | 6.73,92.58 5.65,92.58 J4.P6 | v4.06,92.52 1.97,92.52
  Top 0.15: 6.73,92.58 v6.73,92.52 | TP5.TP 9.46,4.13 14.48,4.13 TP4.TP 14.48,4.19 14.48,10.6 33.02,29.15 33.02,33.27 C1.2 33.02,33.34 33.02,33.53 31.62,34.92 | 29.97,35.43 29.97,37.78 30.8,38.61 D11.2 30.86,38.67 32.58,40.39 33.59,40.39 | 29.97,35.43 29.97,34.35 30.61,33.72 30.61,33.53 C1_BAT.2 | 31.62,34.92 31.3,35.24 31.3,35.31 31.18,35.43 29.97,35.43 | 31.62,34.92 33.53,36.83 D10.2 | 33.59,40.39 34.61,39.37 34.61,38.67 36.13,37.15 36.13,36.96 D9.2 36.13,36.89 35.24,36.01 35.24,34.23 35.94,33.53 35.94,33.34 C2_BAT.2 36.01,33.27 47.12,33.27 57.59,22.8 57.59,21.97 58.23,21.34 R1_PWRUSB.1 58.29,21.27 58.29,19.49 60.39,17.4 D3.1 60.39,17.34 60.39,14.41 58.55,12.57 58.55,4.06 59.75,2.86 59.88,2.86 SJ1.1 59.94,2.86 60.07,2.86 60.96,3.75 63.56,3.75 R2.1 63.63,3.81 63.63,4 64.96,5.33 64.96,11.49 | v39.69,56.71 41.78,56.71 U1.9 | 153.29,8.51 152.65,8.51 152.21,8.95 152.21,9.21 SENSOR2.7 152.15,8.95 151.7,8.51 151.07,8.51 150.88,8.7 150.88,9.78 151.32,10.22 151.32,12.13 SENSOR2.1 | 153.29,8.51 153.8,9.02 153.8,9.21 SENSOR2.5 | 153.29,8.51 153.29,6.73 C5.2 155.38,4.64 157.16,4.64 157.23,4.57 C2.2 157.29,4.64 159.83,7.18 164.47,7.18 J3.1 164.53,7.24 164.85,7.24 165.42,7.81 165.42,50.1 | 162.97,52.29 163.07,52.2 163.64,52.2 J2.B12 163.7,52.13 163.7,51.88 J2.A1 | 162.97,52.29 162.24,53.02 153.86,53.02 R2-USB1.1 | C4_USB.2 150.43,46.8 150.43,48.96 C5_USB.2 150.5,48.96 163.13,48.96 164.21,50.04 J2.MP3 | 165.42,50.1 164.27,50.1 J2.MP3 | 165.42,50.1 168.15,50.1 J2.MP1 168.21,50.16 168.21,60.26 J2.MP2 168.15,60.33 164.27,60.33 J2.MP4 164.21,60.26 163.7,59.75 163.7,58.61 J2.A12 163.7,58.55 163.7,58.29 J2.B1 163.64,58.23 153.1,58.23 147.76,52.9 147.45,52.9 D1.2 147.38,52.9 147.13,52.9 146.56,53.47 143.57,53.47 R2-USB.2 143.51,53.47 v141.48,53.47
  Top 0.15: v162.75,52.07 162.97,52.29 | v162.75,51.05 163.96,49.85 J2.MP3 | 79.92,12.61 80.9,13.59 80.9,13.97 J1.17 80.96,14.03 80.96,14.92 82.3,16.26 85.47,16.26 | 79.92,12.61 78.8,11.49 76.45,11.49 J1.MP2 76.39,11.49 64.96,11.49 | 79.92,12.61 81.03,11.49 J1.MP1 | 82.74,21.46 82.55,21.65 81.53,21.65 81.34,21.46 81.34,21.02 80.07,19.75 80.07,19.62 EPD_C9.1 | 82.74,21.46 82.74,20.45 82.11,19.81 EPD_C8.1 | 85.47,18.86 85.47,16.26 | 85.47,16.26 85.47,14.03 J1.8 | 85.47,18.86 86.23,19.62 EPD_C6.1 86.3,19.68 86.93,20.32 86.93,20.64 87.34,21.05 | 89.03,21.4 89.03,20.51 88.39,19.88 88.39,19.68 EPD_C2.1 | 89.03,21.4 88.9,21.53 87.82,21.53 87.34,21.05 | EPD_C7.1 84.2,19.62 84.64,19.62 85.41,18.86 85.47,18.86 | 90.93,21.59 91.12,21.4 91.12,20.57 90.49,19.94 90.49,19.75 EPD_C1.1 | 90.93,21.59 89.28,21.59 89.09,21.4 89.03,21.4 | 90.93,21.59 90.93,21.65 94.68,25.4 94.68,31.18 C7.2 94.74,31.24 108.46,31.24 116.33,39.12 | 82.74,21.46 83.57,21.46 83.63,21.53 86.87,21.53 87.34,21.05 | v77.41,18.35 78.11,19.05 78.11,19.62 EPD_C10.1 | v76.52,18.99 76.52,19.18 76.07,19.62 EPD_C5.1 76.07,19.68 75.31,19.68 70.55,14.92 62.8,14.92 61.85,13.97 61.85,13.02 62.55,12.32 EPD_C12.1 62.55,12.26 63.88,12.26 EPD_C11.1 63.94,12.19 64.45,12.19 64.96,11.68 64.96,11.49 | U3.13 84.71,60.45 84.71,60.77 87.63,63.69 88.52,63.69 89.6,64.77 D6.2 89.85,64.71 90.55,64.71 97.41,57.85 97.41,54.23 | 97.41,54.23 97.41,52.83 C10_SUPERCAP.1 | C1_BAT2.2 119.19,50.67 119.19,52.13 120.27,53.21 C1_BAT1.2 | 128.4,52.9 128.21,52.7 128.14,52.7 127.76,52.32 IC4.2 | 128.4,52.9 128.4,53.66 128.27,53.78 120.9,53.78 120.4,53.28 C1_BAT1.2
  Top 0.15: 120.4,36.7 120.4,39.75 120.08,40.07 MCP73831.2 120.08,40.13 120.08,40.39 120.78,41.08 124.21,41.08 126.56,38.73 C3.- | 120.4,36.7 120.4,34.73 R2_BAT.1 | 116.33,39.12 D8.2 116.33,39.12 | 116.33,39.12 118.75,36.7 120.4,36.7 | U4.4 133.1,53.53 133.41,53.53 134.05,54.17 U4.9 | U4.1 133.1,54.93 133.41,54.93 134.05,54.29 U4.9 | U4.6 135,53.98 134.3,53.98 134.11,54.17 U4.9 | C3.- 126.62,38.67 127.76,37.53 129.03,37.53 C_DELAY.2 129.03,37.59 135.25,43.81 135.25,48.77 134.43,49.59 134.43,51.63 | 134.43,51.63 134.43,53.91 U4.9 | 128.4,52.9 130.24,52.9 134.62,48.51 134.62,46.48 126.75,38.61 C3.- | 97.41,54.23 119.19,54.23 120.21,53.21 C1_BAT1.2 | 134.43,51.63 v137.54,51.63
  Bottom 0.15: v56.9,105.28 v54.1,108.08 | v4.06,92.52 v6.73,92.52 6.73,92.58 10.1,95.95 v11.68,95.95 | v38.42,55.44 v39.69,56.71 | v162.75,51.05 v162.75,52.07 | v77.41,18.35 77.15,18.35 v76.52,18.99 | v141.48,53.47 139.38,53.47 v137.54,51.63
  pour Top: -5.32,-5.12 178.02,-5.12 178.02,116.32 -5.32,116.32
  pour Bottom: -9.02,-10.02 183.32,-10.02 183.32,121.02 -9.02,121.02
GPIO8  (via drill 0.3)
  Top 0.15: v62.23,11.49 63.12,10.6 63.12,9.78 R1.2 | v18.41,45.28 19.24,46.1 19.24,46.42 U2.10
  Bottom 0.15: v62.23,11.49 44.96,11.49 17.53,38.92 17.53,44.39 v18.41,45.28
I2C_PW  (via drill 0.3)
  Top 0.15: R1_PINH.2 153.03,3.49 151.32,3.49 R2-PINH.2 151.26,3.56 v141.8,13.02 | v27.88,55.5 21.84,61.53 21.84,63.88 U2.17 | v27.88,43.56 v31.5,39.94 | v60.64,23.69 v47.43,36.89 | v64.77,22.8 64.77,20.89 v64.58,20.7
  Bottom 0.15: v27.88,43.56 v27.88,55.5 | v31.5,39.94 32.32,39.94 35.37,36.89 v47.43,36.89 | v60.64,23.69 63.88,23.69 v64.77,22.8 | v64.58,20.7 64.58,20 71.56,13.02 v141.8,13.02
IC2_PW
  Top 0.15: C2.1 157.23,3.24 156.4,3.24 155.96,2.79 99.95,2.79 92.33,10.41 71.31,10.41 62.93,2.03 59.05,2.03 34.99,26.1 34.99,32.7 33.08,34.61 C1.1
INT_RTC  (via drill 0.3)
  Top 0.15: 83.5,50.67 83.44,50.74 83.44,51.05 U3.3 83.5,50.67 | 83.5,50.67 84.33,49.85 88.84,49.85 90.11,48.58 90.23,48.58 R1_PINH1.1 | v31.75,31.43 16.76,31.43 | 16.76,31.43 5.21,31.43 TP15.TP | 83.5,50.67 v64.26,31.43 | v16.76,42.99 16.76,46.42 U2.8 | v16.76,31.5 16.76,31.43
  Bottom 0.15: v64.26,31.43 v31.75,31.43 | v16.76,31.5 v16.76,42.99
IO/BOOT  (via drill 0.3)
  Top 0.15: v35.75,48.7 34.99,47.94 C6.1 | R_BOOT.1 60.52,108.14 v61.15,107.5 61.21,107.5 61.85,108.14 62.23,108.14 BOOT_BUTTON.4 62.29,108.2 65.72,108.2 BOOT_BUTTON.3 | v34.86,55.31 26.29,63.88 24.38,63.88 U2.15
  Bottom 0.15: v35.75,48.7 35.75,49.53 38.07,51.85 | 38.07,51.85 59.37,73.15 59.37,105.73 v61.15,107.5 | v34.86,55.31 36.58,53.59 36.58,53.34 38.07,51.85
IO/CHANGE  (via drill 0.3)
  Top 0.15: R_CHANGE.1 45.66,108.2 47.24,108.2 CHANGE_BUTTON.4 47.31,108.2 50.74,108.2 CHANGE_BUTTON.3 50.8,108.2 51.12,108.52 v51.82,108.52 | v66.86,108.14 67.69,108.14 C10.1 | v6.92,86.81 14.16,79.57 14.16,63.94 U2.23
  Bottom 0.15: v66.86,108.14 54.67,108.14 54.29,108.52 v51.82,108.52 18.99,108.52 3.3,92.84 3.3,92.2 6.92,88.58 v6.92,86.81
MISO  (via drill 0.3)
  Top 0.15: 10.35,98.81 13.08,98.81 13.14,98.87 D12.1 | 10.35,98.81 9.46,98.81 R8.1 | v37.02,57.91 37.53,57.4 37.85,57.4 U1.2 | v7.81,93.03 6.6,93.03 5.97,93.66 5.84,93.66 J4.P7 | v37.02,53.53 16.76,33.27 5.33,33.27 3.94,31.88 3.94,28.13 4.32,27.75 4.32,4.13 TP6.TP | v10.35,95.5 10.35,98.81 | v13.27,79.76 9.14,75.63 9.14,63.94 U2.27
  Bottom 0.15: 17.18,83.66 v7.81,93.03 7.87,93.03 v10.35,95.5 | 17.18,83.66 37.02,63.82 v37.02,57.91 v37.02,53.53 | 17.18,83.66 v13.27,79.76
MOSI  (via drill 0.3)
  Top 0.15: v81.34,12.57 82.36,13.59 82.36,13.97 J1.14 | v61.59,20.57 61.59,20.89 61.15,21.34 R7.1 | v33.4,39.94 32.04,38.58 | 32.04,38.58 30.86,37.4 30.86,37.21 D11.1 | v45.66,53.91 45.66,54.8 U1.5 45.72,54.86 47.7,54.86 53.65,60.81 53.65,61.46 TP7.TP | J4.P3 5.84,89.28 6.54,89.28 34.09,61.73 v34.42,61.73 | v47.56,20.57 34.29,33.85 34.29,37.4 34.1,37.59 33.02,37.59 32.04,38.58 | v19.11,41.27 17.84,41.27 15.49,43.62 15.49,46.42 U2.7
  Bottom 0.15: v81.34,12.57 66.23,12.57 64.71,11.05 64.33,11.05 61.59,13.78 v61.59,20.57 v47.56,20.57 38.48,20.57 31.56,27.5 30.29,27.5 19.11,38.67 v19.11,41.27 | v33.4,39.94 33.4,41.66 37.75,46.01 | v45.66,53.91 37.75,46.01 | 37.75,46.01 34.42,49.34 v34.42,61.73
N$1
  Top 0.15: J1.22 78.42,14.03 78.42,18.86 78.8,19.24 78.8,20.32 78.17,20.95 EPD_C10.2
N$2
  Top 0.15: 127.06,51.88 127.57,51.37 127.7,51.37 IC4.1 127.76,51.31 128.97,51.31 133.1,47.18 133.48,47.18 Q1.2 | 127.06,51.88 127.06,52.7 127.57,53.21 127.7,53.21 IC4.3 | 117.38,51.28 119,52.9 119,53.21 C1_BAT1.1 | 117.38,51.28 101.73,35.62 78.49,35.62 77.85,36.26 77.34,36.26 D2.1 | 127.06,51.88 126.49,51.88 124.59,49.97 118.68,49.97 117.38,51.28
N$3
  Top 0.15: R2_BAT.2 120.46,33.4 120.46,33.59 121.16,34.29 121.16,37.34 121.03,37.47 MCP73831.5
N$4
  Top 0.15: J1.20 79.44,14.03 79.44,17.84 81.34,19.75 81.34,20.32 82.04,21.02 EPD_C8.2
N$5  (via drill 0.3)
  Top 0.15: v146.43,52.26 143.57,52.26 R2-USB.1 | v162.5,56.9 163.64,56.9 J2.B5
  Bottom 0.15: v146.43,52.26 157.86,52.26 v162.5,56.9
N$6
  Top 0.15: 94.17,31.75 98.3,31.75 113.35,46.8 123.19,46.8 C4.1 | 94.17,31.75 91.95,29.53 91.95,29.15 91.82,29.02 88.33,29.02 87.69,29.65 D4.1 | D3.2 63.94,17.4 68.26,17.4 79.31,28.45 81.6,28.45 87.31,34.16 92.01,34.16 94.04,32.13 94.04,31.94 94.17,31.81 94.17,31.75
N$7  (via drill 0.3)
  Top 0.15: v60.39,65.02 33.27,92.14 16.13,92.14 15.37,92.9 11.87,92.9 6.35,98.42 5.97,98.42 R1_BAT.1 | v102.93,54.67 v92.58,65.02 | v121.67,40.64 121.54,40.64 121.03,40.13 MCP73831.1
  Bottom 0.15: v92.58,65.02 v60.39,65.02 | v102.93,54.67 107.63,54.67 v121.67,40.64
N$8  (via drill 0.3)
  Top 0.15: v113.98,46.35 113.98,39.43 CHG_LED.C | R1_BAT.2 5.97,99.76 6.6,99.12 6.6,98.61 10.16,95.06 30.99,95.06 72.71,53.34 75.53,53.34 78.03,55.84 76.74,57.12 76.74,58.18 77.42,58.86 78.43,58.86 83.95,53.34 v91.89,53.34
  Bottom 0.15: v113.98,46.35 113.98,46.61 114.43,47.05 114.43,47.43 108.52,53.34 v91.89,53.34
N$9  (via drill 0.3)
  Top 0.15: v81.79,19.05 79.95,17.21 79.95,14.03 J1.19 | v83.31,20.57 83.5,20.57 83.82,20.89 84.14,20.89 EPD_C7.2
  Bottom 0.15: v83.31,20.57 v81.79,19.05
N$10
  Top 0.15: R2-USB1.2 153.86,54.29 162.81,54.29 163.13,53.98 163.64,53.98 J2.A5
N$11
  Top 0.15: J1.18 80.45,14.03 80.45,17.02 83.44,20 83.44,20.07 83.76,20.38 85.72,20.38 86.23,20.89 EPD_C6.2
N$12
  Top 0.15: J1.24 77.41,13.97 65.47,13.97 64.45,12.95 63.06,12.95 62.55,13.46 EPD_C12.2
N$13  (via drill 0.3)
  Top 0.15: v38.86,47.75 37.78,47.75 D7.1 | R_CAPACITOR.2 93.79,50.8 91.56,53.03 83.87,53.03 78.32,58.58 77.53,58.58 77.02,58.06 77.02,57.23 78.36,55.89 78.36,55.79 75.54,52.96 v44.07,52.96
  Bottom 0.15: v44.07,52.96 v38.86,47.75
N$14
  Top 0.15: J1.5 86.93,14.03 86.93,19.49 88.33,20.89 EPD_C2.2
N$15
  Top 0.15: J1.4 87.44,14.03 87.44,17.59 89.72,19.88 89.72,20.26 90.42,20.95 EPD_C1.2
N$17
  Top 0.15: 152.21,9.97 152.53,9.97 152.97,9.53 152.97,9.27 SENSOR2.6 | 152.21,9.97 151.83,9.97 151.38,9.53 151.38,9.27 SENSOR2.8 | 152.21,9.97 152.21,12.13 SENSOR2.2
N$21
  Top 0.15: C_DELAY.1 129.09,38.8 129.09,40.51 134.94,46.35 134.94,48.64 127.06,56.52 101.73,56.52 61.59,96.65 61.59,97.09 61.53,97.16 59.12,97.16 57.98,96.01 IC1.5
PREVGH
  Top 0.15: J1.21 78.93,14.03 78.93,18.92 79.38,19.37 79.38,20.19 80.01,20.83 EPD_C9.2 80.07,20.89 80.07,23.37 89.92,33.21 D5.1
PREVGL
  Top 0.15: 76.96,14.61 64.96,14.61 63.94,13.59 EPD_C11.2 | 76.96,14.61 77.66,14.61 77.92,14.35 77.92,14.03 J1.23 | 76.96,14.61 76.96,20.95 89.85,33.85 91.89,33.85 92.01,33.72 92.01,32.77 91.19,31.94 91.19,29.72 D4.2
RESE  (via drill 0.3)
  Top 0.15: v81.22,11.94 86.23,11.94 87.88,13.59 87.88,13.97 J1.3 87.95,14.03 87.95,14.41 v100.08,26.54 | v62.36,10.73 60.39,8.76 Q3.2 | v100.08,37.4 114.81,52.13 114.81,53.47 R3.1
  Bottom 0.15: v81.22,11.94 66.04,11.94 64.83,10.73 v62.36,10.73 | v100.08,26.54 v100.08,37.4
RESE'
  Top 0.15: 60.64,5.08 63.56,5.08 R2.2 | 60.64,5.08 59.94,4.38 SJ1.2 | R3.2 116.08,53.47 116.08,52.77 100.27,36.96 76.83,36.96 64.33,24.45 64.33,22.42 63.56,21.65 63.12,21.65 62.04,20.57 62.04,15.62 59.24,12.83 59.24,9.65 59.88,9.02 59.88,7.05 60.2,6.73 60.2,5.59 60.64,5.14 60.64,5.08
RESET  (via drill 0.3)
  Top 0.15: R_RESET.1 20.45,108.08 22.16,108.08 22.23,108.14 RESET_BUTTON.4 22.29,108.14 24,108.14 24.7,107.44 v24.77,107.44 25.02,107.44 25.72,108.14 RESET_BUTTON.3 | v51.82,105.03 57.91,98.93 57.91,98.81 IC1.1 57.98,98.74 58.36,98.36 v59.82,98.36 | v153.92,4.76 155.32,3.37 C5.1 | v11.75,48.7 10.41,47.37 10.41,46.48 U2.3
  Bottom 0.15: v51.82,105.03 27.18,105.03 v24.77,107.44 18.35,107.44 3.62,92.71 3.62,92.33 11.75,84.2 v11.75,48.7 | v153.92,4.76 153.92,9.4 141.92,21.4 141.92,59.75 134.87,66.8 92.08,66.8 75.95,82.93 75.95,83.95 61.53,98.36 v59.82,98.36
RTC_RST  (via drill 0.35)
  Top 0.152: U2.16 23.4,63.6 23.4,62.2 v27.1,62.2 | v30.3,61.3 34.5,61.3 v35.2,60.6 | v36.2,62.8 v40.7,62.8 | v48,62.8 51.4,62.8 v53.2,61 | v77.9,57.6 78.3,57.6 83.58,52.32 83.99,52.32 83.99,51.1 U3.4 84.7,51.07 84.7,51.04 84.67,51.07 U3.4
  Bottom 0.152: v27.1,62.2 29.4,62.2 v30.3,61.3 | v35.2,60.6 36.2,61.6 v36.2,62.8 | v40.7,62.8 v48,62.8 | v53.2,61 57.7,56.5 77.9,56.5 v77.9,57.6
RX  (via drill 0.3)
  Top 0.15: v11.3,57.02 12.89,58.61 12.89,63.88 U2.24 | v28.64,12.38 28.64,8.06 24.7,4.13 TP2.TP
  Bottom 0.15: v11.3,57.02 11.3,29.72 v28.64,12.38
SCK  (via drill 0.3)
  Top 0.15: v81.98,15.3 82.87,14.41 82.87,14.03 J1.13 | v60.64,24.32 60.64,35.75 45.69,50.7 | 45.69,50.7 43.62,52.77 43.62,53.78 45.66,55.82 45.66,56.07 U1.6 | v129.54,55.75 129.54,57.4 R6.1 | v34.16,39.18 33.59,38.61 33.59,38.35 D10.1 | 45.69,50.7 v45.66,50.67 | v15.81,81.6 5.97,91.44 5.84,91.44 J4.P5 | 14.22,40.83 20.26,40.83 20.7,40.39 v23.24,40.39 | 14.22,40.83 5.02,40.83 TP8.TP | 14.22,40.83 14.22,46.42 U2.6
  Bottom 0.15: v60.64,24.32 72.71,24.32 81.72,15.3 v81.98,15.3 97.66,15.3 129.54,47.18 v129.54,55.75 | v45.66,50.67 v34.16,39.18 33.53,39.18 32.96,39.75 32.96,40.39 | v15.81,81.6 15.81,76.77 32.96,59.63 32.96,40.39 | 32.96,40.39 v23.24,40.39
SCL  (via drill 0.3)
  Top 0.15: 152.97,13.21 150.94,13.21 150.24,12.51 150.24,8.45 151.26,7.43 151.26,4.89 R2-PINH.1 | 152.97,13.21 153.73,12.45 153.73,12.19 SENSOR2.4 | 135.73,54.07 144.34,45.47 144.34,30.35 157.26,17.43 | 135.73,54.07 135.38,54.42 135.06,54.42 U4.7 | 157.26,17.43 164.47,10.22 J3.4 | v135.76,54.1 135.73,54.07 | v153.35,13.53 153.03,13.21 152.97,13.21 | v157.23,17.4 157.26,17.43 | v33.4,54.29 27.37,54.29 18.03,63.63 18.03,63.88 U2.20 | v36.64,46.48 37.02,46.48 v37.47,46.93 | v58.67,68.01 69.28,68.01 76.83,60.45 80.83,60.45 U3.16 80.9,60.39 80.9,60.07 82.71,58.26 82.93,58.26 84.67,56.52 v88.77,56.52
  Bottom 0.15: v88.77,56.52 126.75,56.52 127.64,57.4 132.46,57.4 v135.76,54.1 | v157.23,17.4 v153.35,13.53 | v33.4,54.29 33.4,49.72 v36.64,46.48 | v37.47,46.93 38.42,47.88 38.42,47.94 58.48,68.01 v58.67,68.01
SDA  (via drill 0.3)
  Top 0.15: v145.22,45.28 135.57,54.93 135.06,54.93 U4.8 135,54.99 134.68,55.31 128.84,55.31 127.19,56.96 v126.56,56.96 | v152.65,11.3 152.65,11.81 152.97,12.13 SENSOR2.3 152.97,12.19 152.97,12.45 152.53,12.89 151.07,12.89 150.56,12.38 150.56,8.57 153.03,6.1 153.03,4.83 R1_PINH.1 | v159.19,9.21 164.47,9.21 J3.3 | v88.39,56.96 85.22,56.96 82.17,60.01 82.17,60.39 U3.15 | v33.4,56.13 32.32,55.05 27.69,55.05 19.3,63.44 19.3,63.88 U2.19 | v33.78,64.45 35.69,66.36 58.61,66.36 59.94,65.02 59.94,64.83 v65.98,58.8 | v81.47,58.8 81.66,58.8 82.48,57.98 82.81,57.98 84.72,56.07 v87.57,56.07
  Bottom 0.15: v145.22,45.28 145.22,18.73 v152.65,11.3 152.72,11.3 154.81,9.21 v159.19,9.21 | v126.56,56.96 v88.39,56.96 88.39,56.9 v87.57,56.07 | v33.4,56.13 33.4,64.07 v33.78,64.45 | v81.47,58.8 v65.98,58.8
SRC  (via drill 0.3)
  Top 0.15: v62.67,15.81 59.75,12.89 59.75,10.86 Q3.3 | v64.01,18.61 64.01,18.86 76.14,30.99 76.14,31.3 L1.1 76.2,31.37 v79.82,31.37 | v113.98,47.24 114.87,48.13 123.19,48.13 C4.2 | v88.65,33.72 88.14,33.72 87.69,33.27 D5.2
  Bottom 0.15: v62.67,15.81 62.67,17.27 v64.01,18.61 | v113.98,47.24 102.17,47.24 v88.65,33.72 88.58,33.72 86.23,31.37 v79.82,31.37
SS_SD  (via drill 0.3)
  Top 0.15: v59.44,7.81 59.44,6.35 R10.1 | v57.78,9.46 57.78,20.64 56.26,22.16 v56.26,23.5 | v87.5,64.14 87.69,64.14 D6.1 | v25.78,66.17 25.78,68.58 6.22,88.14 J4.P2 | v26.04,47.43 12.38,47.43 11.68,46.74 11.68,46.48 U2.4
  Bottom 0.15: v57.78,9.46 v59.44,7.81 | v87.5,64.14 69.6,46.23 69.6,36.13 64.45,30.99 64.33,30.99 56.83,23.5 v56.26,23.5 39.05,23.5 22.8,39.75 22.8,40.58 26.1,43.88 26.1,47.43 | v25.78,66.17 26.1,65.85 26.1,47.43 | v26.04,47.43 26.1,47.43
TX  (via drill 0.3)
  Top 0.15: v11.3,57.66 11.62,57.98 11.62,63.88 U2.25 | v29.65,10.73 29.65,4.19 29.72,4.13 TP1.TP
  Bottom 0.15: v11.3,57.66 10.86,57.21 10.86,29.53 v29.65,10.73
USB_D+  (via drill 0.3)
  Top 0.15: v134.24,60.45 140.46,54.23 144.02,54.23 144.4,53.85 147.38,53.85 D1.1 | v90.61,65.47 v95.63,60.45 | v58.04,65.47 56.39,63.82 44.7,63.82 39.24,58.36 39.24,53.98 v37.27,52.01 | v35.24,54.29 34.67,54.29 26.86,46.48 24.38,46.48 U2.14
  Bottom 0.15: v95.63,60.45 v134.24,60.45 | v58.04,65.47 v90.61,65.47 | v37.27,52.01 37.27,52.2 35.24,54.23 v35.24,54.29
USB_D-  (via drill 0.3)
  Top 0.15: v145.22,51.82 146.62,51.82 146.69,51.88 147.38,51.88 D1.3 | v142.37,54.67 v135.95,61.09 | v95.63,61.09 90.81,65.91 v72.45,65.91 | v58.42,65.91 35.69,65.91 34.86,65.09 v34.86,63.01 | v26.54,46.04 25.46,46.04 24.89,45.47 23.81,45.47 23.11,46.16 23.11,46.42 U2.13 | v31.75,59.05 33.57,60.87 v33.85,60.87
  Bottom 0.15: v142.37,54.67 v145.22,51.82 | v95.63,61.09 v135.95,61.09 | v72.45,65.91 v58.42,65.91 | v31.75,59.05 30.8,59.05 26.54,54.8 v26.54,46.04 | v34.86,63.01 34.86,62.78 33.85,61.76 v33.85,60.87
VBAT  (via drill 0.3)
  Top 0.3: U4.2 133.1,54.42 133.1,53.98 U4.3 132.91,53.98 132.65,53.98 132.4,53.72 v132.4,51.82 | v132.4,50.1 132.4,49.59 132.59,49.4 Q1.3 132.65,49.21 132.78,49.21 134.24,47.75 134.24,46.61 129.09,41.47 120.08,41.47 119.13,40.51 119.13,40.13 MCP73831.3 119,40.01 v118.24,40.01 | v34.54,31.88 34.54,19.05 19.62,4.13 TP3.TP | C2_BAT.1 36.01,34.61 v36.64,33.97 36.77,33.91 46.99,33.91 57.59,23.3 v58.67,23.3
  Bottom 0.3: v132.4,50.1 v132.4,51.82 | v34.54,31.88 v36.64,33.97 | v118.24,40.01 95.69,40.01 80.52,24.83 60.2,24.83 v58.67,23.3
VBUS  (via drill 0.3)
  Top 0.3: v58.67,24.07 59.18,23.56 59.18,23.05 58.74,22.61 58.29,22.61 R1_PWRUSB.2 | v78.68,36.07 79.25,36.07 79.44,36.26 D2.2 79.57,36.32 v101.79,36.32 | v32.26,29.02 32.26,33.21 30.67,34.8 C1_BAT.1 | 117.25,39.78 119.06,37.97 119.06,37.53 MCP73831.4 | 117.25,39.78 116.9,40.13 115.76,40.13 115.57,39.94 115.57,39.75 113.98,38.16 113.98,37.91 CHG_LED.A 113.86,37.85 v112.33,36.32 | 117.25,39.78 117.98,40.51 118.11,40.51 124.71,47.12 131.64,47.12 Q1.1 131.76,47.24 v132.4,47.24 | 149.03,51.31 149.03,49.09 C5_USB.1 149.16,48.9 149.16,46.8 C4_USB.1 149.29,46.67 149.73,46.23 149.73,43.12 PFMF.050.1.2 | 149.03,51.31 149.03,52.32 149.54,52.83 149.92,52.83 D1.5 | 139.67,54.52 142.88,51.31 149.03,51.31 | 139.67,54.52 134.81,59.37 99.38,59.37 84.01,74.74 84.01,105.47 TP14.TP | v139.57,54.42 139.67,54.52
  Bottom 0.3: v78.68,36.07 70.8,36.07 58.8,24.07 v58.67,24.07 58.55,24 57.09,22.54 38.86,22.54 32.38,29.02 v32.26,29.02 | v139.57,54.42 v132.4,47.24 | v112.33,36.32 v101.79,36.32
VRTC
  Top 0.15: C10_SUPERCAP.2 97.41,50.67 96.01,52.07 93.85,52.07 R_CAPACITOR.1 93.79,52.13 88.84,57.09 88.84,57.15 87.44,58.55 84.9,58.55 83.44,60.01 83.44,60.39 U3.14 83.38,60.45 83.38,60.77 82.49,61.66 76.07,61.66 29.65,108.08 27.75,108.08 C8.1
VUSB  (via drill 0.3)
  Top 0.3: J2.A4 163.7,52.7 163.7,52.9 J2.B9 163.83,52.96 164.34,52.96 v164.66,53.28 | J2.A9 163.7,57.72 163.7,57.47 J2.B4 163.83,57.4 164.4,57.4 v164.66,57.15 | v146.43,44.2 145.35,43.12 PFMF.050.1.1
  Bottom 0.3: v164.66,57.15 v164.66,53.28 164.53,53.21 159.32,53.21 150.3,44.2 v146.43,44.2